# Altium PCB UART_BUS.PcbDoc
Units mil, origin at the board's own origin, x right, y up, seen from the top; angles counter-clockwise.
Board outline 1585 x 790 mil, 2 copper layers (Top Layer, Bottom Layer); 9 components, 6 nets, 42 pads, 0 vias.
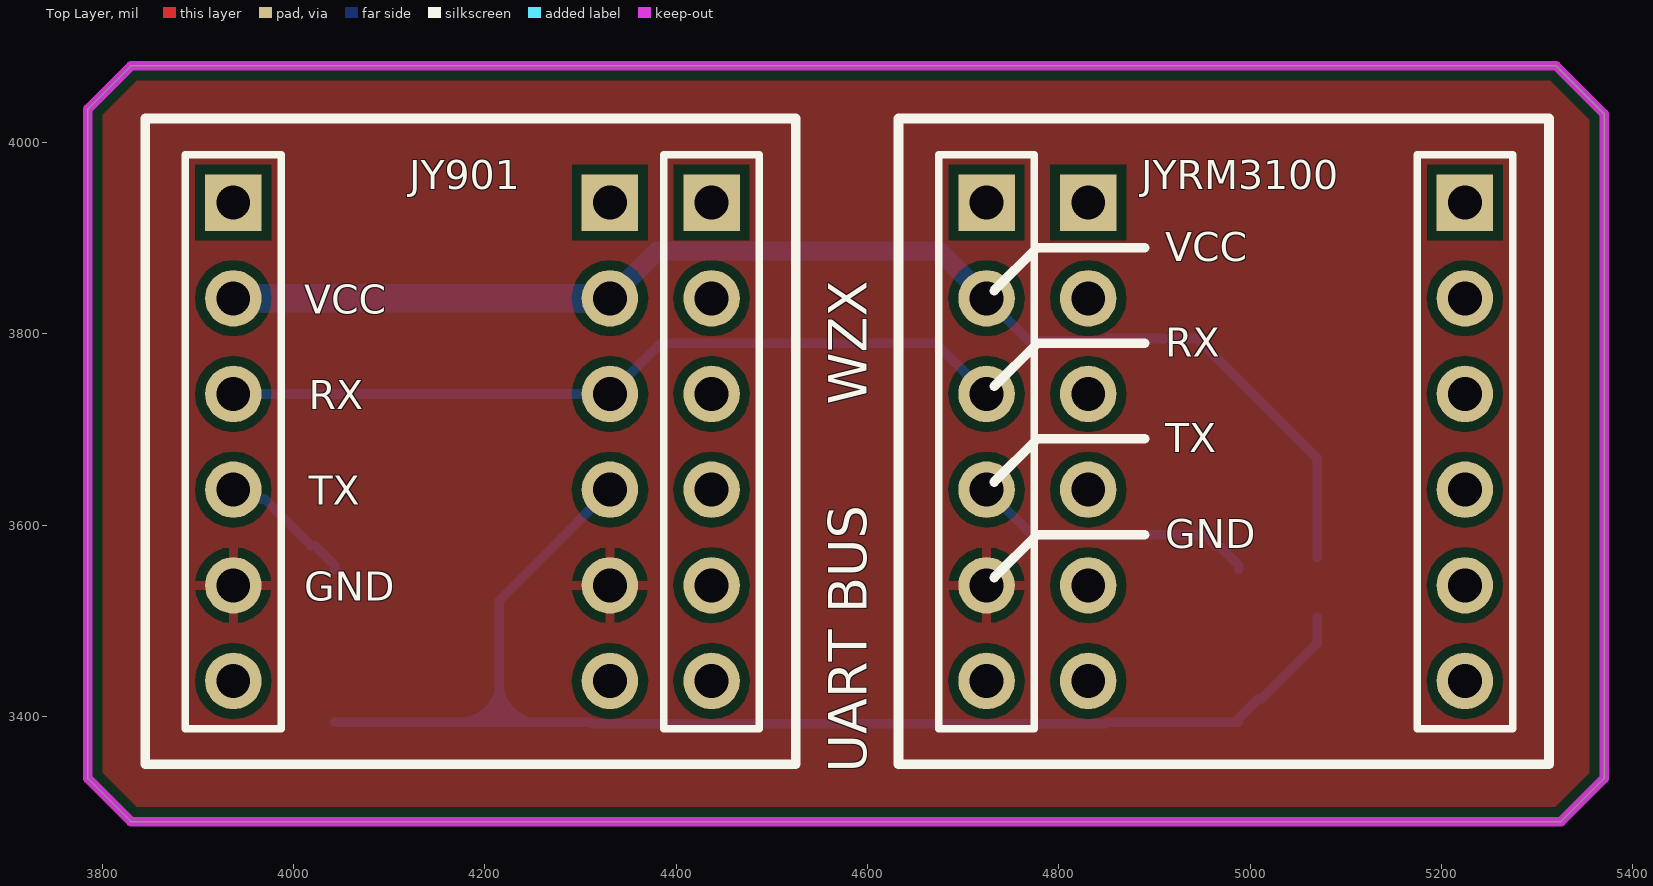
[diagram p0: Top Layer view]
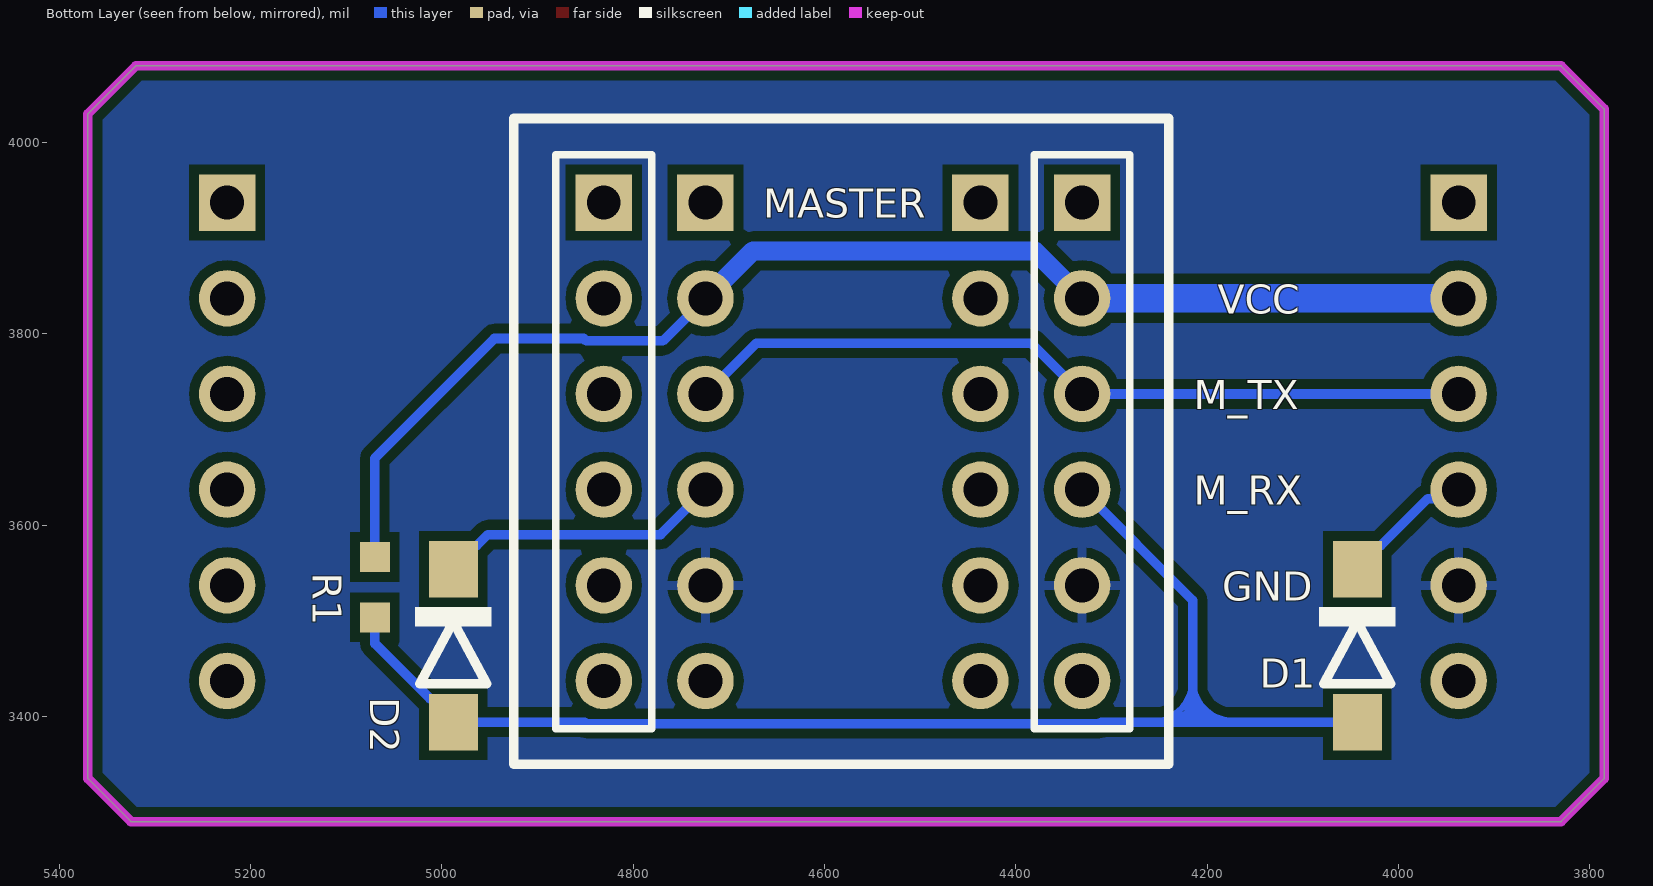
[diagram p1: Bottom Layer view, seen from below]

## Layer stack, top to bottom
Top Solder: solder mask 0.4, Solder Resist, Dk 3.5
Top Layer: signal copper 1.4
Dielectric 1: dielectric 12.6, FR-4, Dk 4.8
Bottom Layer: signal copper 1.4
Bottom Solder: solder mask 0.4, Solder Resist, Dk 3.5

## Board outline
3785,3335 3830,3290 5325,3290 5370,3335 5370,4030 5320,4080 3830,4080 3785,4035

## Design rules (kind name [scope] priority, off if disabled: settings)
Clearance [All] p1: gap=10 ignorepadtopadclearanceinfootprint=FALSE except(0: Arc-Hole Track-Hole SMDPad-Hole THPad-Hole Via-Hole Fill-Hole Poly-Hole Region-Hole Text-Hole)
PolygonConnect [All] p1: connectstyle=Relief reliefconductorwidth=10 reliefentries=4 polygonreliefangle="90 Angle" airgapwidth=10
RoutingVias [All] p1: holewidth=28 width=50 viastyle="Through Hole" minholewidth=28 minwidth=50 maxholewidth=28 maxwidth=50
SolderMaskExpansion [All] p1: expansion=4 istentingtop=FALSE
Width [All] p1: maxlimit=100 minlimit=1 preferedwidth=30 minimp=50.000000 maximp=50.000000 favimp=50.000000
30 further rules are at their usual default settings.

## Classes and differential pairs
component class UART_BUS: D1 D2 R1

## Components (designator, comment, footprint, x,y, rotation, side; value= is the part's Value field where it differs from the comment)
D1 "1N4148" 1N4148_S 4045,3460 r90 bottom
D2 "1N4148" 1N4148_S 4990,3460 r90 bottom
JY901_1 "Device Name" HDR1X6 3937.01,3937.01 r270 top
JY901_2 "Device Name" HDR1X6 4437.01,3937.01 r270 top
JYRM3100_1 "Device Name" HDR1X6 4724.41,3937.01 r270 top
JYRM3100_2 "Device Name" HDR1X6 5224.41,3937.01 r270 top
MASTER1 "Device Name" HDR1X6 4330.71,3937.01 r270 bottom
MASTER2 "Device Name" HDR1X6 4830.71,3937.01 r270 bottom
R1 "xxR/Precision/Footprint" "RES 0603" 5070,3535 r90 bottom

## Footprints (in the part's own frame and the unit in brackets; to place one, negate y for a bottom-side part, rotate by r counter-clockwise, add the part's x,y. Pads: shape width x height; smd on the part's side, far side on the other; paste and mask are expansions set on the pad)
1N4148_S [mil]
  rect 59.06x51.18 smd: 1(-66,-2) 2(94,-2)
  silkscreen extent -26,-42 54,38
HDR1X6 [mm] "Connector; Header; 6 Position"
  rect 1.5x1.5 hole 0.9: 1(0,0)
  round 1.5 hole 0.9: 2(2.54,0) 3(5.08,0) 4(7.62,0) 5(10.16,0) 6(12.7,0)
  silkscreen extent -1.27,-1.27 13.97,1.27
"RES 0603" [mm] "贴片电阻0603封装"
  rect 0.8x0.8 smd paste-1: 1(-0.8,0) 2(0.8,0)
  body extent -0.8,-0.41 0.8,0.41, height 0.51

## Part data
D1 D2: library part "D Schottky", "Schottky Diode", Code_JEDEC=DO-214-AA, LatestRevisionDate=17-Jul-2002, LatestRevisionNote="Re-released for DXP Platform.", PackageReference=SMB, Published=8-Jun-2000, Publisher="Altium Limited"
JY901_1 JY901_2 JYRM3100_1 JYRM3100_2 MASTER1 MASTER2: library part "Header 6", "Header, 6-Pin", Manufacture="Device Name", Sch Name="Header 6"
R1: library part "Resistor Chip", "Resistor Chip", Manufacture=xxR/Precision/Footprint, Sch Name=1k

## Nets (pads, with @x,y where several pads share a name; then routed paths per layer and width w, separated by ;. In a path a pad name is that pad's centre, name@x,y a point inside that pad or via, vN(x,y) a via of type N, cw(c..) or ccw(c..) an arc to the next point about the centre after c; other vN are vias at no path point)
901_RX: JY901_1.3 JYRM3100_1.3 MASTER1.3 | length 831.3
  Bottom Layer w10: JY901_1.3 MASTER1.3 4383.7,3790 4671.42,3790 JYRM3100_1.3
901_TX: D1.2 JY901_1.4 | length 142.7
  Bottom Layer w10: JY901_1.4 3946.39,3627.62 3969.38,3627.62 4018.47,3578.53 4022.41,3578.53 4043,3557.94 D1.2
3100_TX: D2.2 JYRM3100_1.4 | length 300.3
  Bottom Layer w10: JYRM3100_1.4 4771.42,3590 4952,3590 4963.47,3578.53 4967.41,3578.53 4988,3557.94 D2.2
GND: JY901_1.5 JYRM3100_1.5 MASTER1.5
M_RX: D1.1 D2.1 MASTER1.4 R1.1 | length 1677.3
  Bottom Layer w7: 4170,3395 ccw(c4172.5,3437.5) 4215,3435 ; 4190,3395 ccw(c4182.5,3427.5) 4215,3435 ; 4200,3395 ccw(c4197.5,3412.5) 4215,3415 ; 4214.3,3417.43 ccw(c4230.86,3411.57) 4225,3395 ; 4235,3395 cw(c4245,3425) 4215,3435 ; 4262.87,3394 cw(c4259.44,3438.44) 4215,3435
  Bottom Layer w10: D1.1 4215,3394 ; MASTER1.4 4215,3521.3 4215,3394 ; R1.1 5070,3476 5012.53,3418.53 5008.59,3418.53 4988,3397.94 D2.1 4850.67,3394 4849.15,3392.48 4312.26,3392.48 4310.75,3394 4215,3394
VCC: JY901_1.2 JYRM3100_1.2 MASTER1.2 R1.2 | length 1348.8
  Bottom Layer w10: JYRM3100_1.2 4768.94,3792.48 4849.15,3792.48 4851.67,3795 4945,3795 5070,3670 R1.2
  Bottom Layer w20: MASTER1.2 4380.24,3886.54 4674.88,3886.54 JYRM3100_1.2
  Bottom Layer w30: JY901_1.2 MASTER1.2
pads on no net: JY901_1.1 JY901_1.6 JY901_2.1 JY901_2.2 JY901_2.3 JY901_2.4 JY901_2.5 JY901_2.6 JYRM3100_1.1 JYRM3100_1.6 JYRM3100_2.1 JYRM3100_2.2 JYRM3100_2.3 JYRM3100_2.4 JYRM3100_2.5 JYRM3100_2.6 MASTER1.1 MASTER1.6 MASTER2.1 MASTER2.2 MASTER2.3 MASTER2.4 MASTER2.5 MASTER2.6

## Polygon pours and split planes (outlines as drawn)
GND on Bottom Layer "GND_L02_P000" (solid, remove dead copper, pour order 0): 3735,4140 3725,4130 3725,3245 3865,3245 3945,3165 4015,3235 5420,3235 5420,4100 5390,4130
GND on Top Layer "GND_L01_P002" (solid, remove dead copper, pour order 2): 3735,4130 5365,4130 5465,4030 5455,4020 5455,3295 5355,3195 5345,3205 3710,3205

## Keep-outs
Keep-Out Layer:
  the board outline again, w10

## Silkscreen, mask and mechanical layers (free items; w line width, h text height)
Top Overlay:
  lines w10: 4732.4,3545 4777.4,3590 4875,3590 4890,3590 ; 4732.4,3645 4777.4,3690 4875,3690 4890,3690 ; 4732.4,3745 4777.4,3790 4875,3790 4890,3790 ; 4732.4,3845 4777.4,3890 4875,3890 4890,3890 ; 3845,3350 3845,4025 4525,4025 4525,3350 3845,3350 ; 4632.4,3350 5312.4,3350 5312.4,4025 4632.4,4025 4632.4,3350
  text "JY901" at 4121,3951 h30
  text "JYRM3100" at 4886,3951 h30
  text "VCC" at 4911,3876 h30
  text "VCC" at 4011,3821 h30
  text "RX" at 4911,3776 h30
  text "WZX" at 4599,3726 h40 r90
  text "RX" at 4016,3721 h30
  text "TX" at 4911,3676 h30
  text "TX" at 4016,3621 h30
  text "GND" at 4911,3576 h30
  text "GND" at 4011,3521 h30
  text "UART BUS" at 4599,3341 h40 r90
Bottom Overlay:
  lines w10: 4240,3350 4925,3350 4925,4025 4240,4025 4240,3350
  text "MASTER" at 4664,3921 h30
  text "VCC" at 4189,3821 h30
  text "M_TX" at 4214,3721 h30
  text "M_RX" at 4214,3621 h30
  text "GND" at 4184,3521 h30